# EAGLE board M168X (EAGLE 6.6.0)
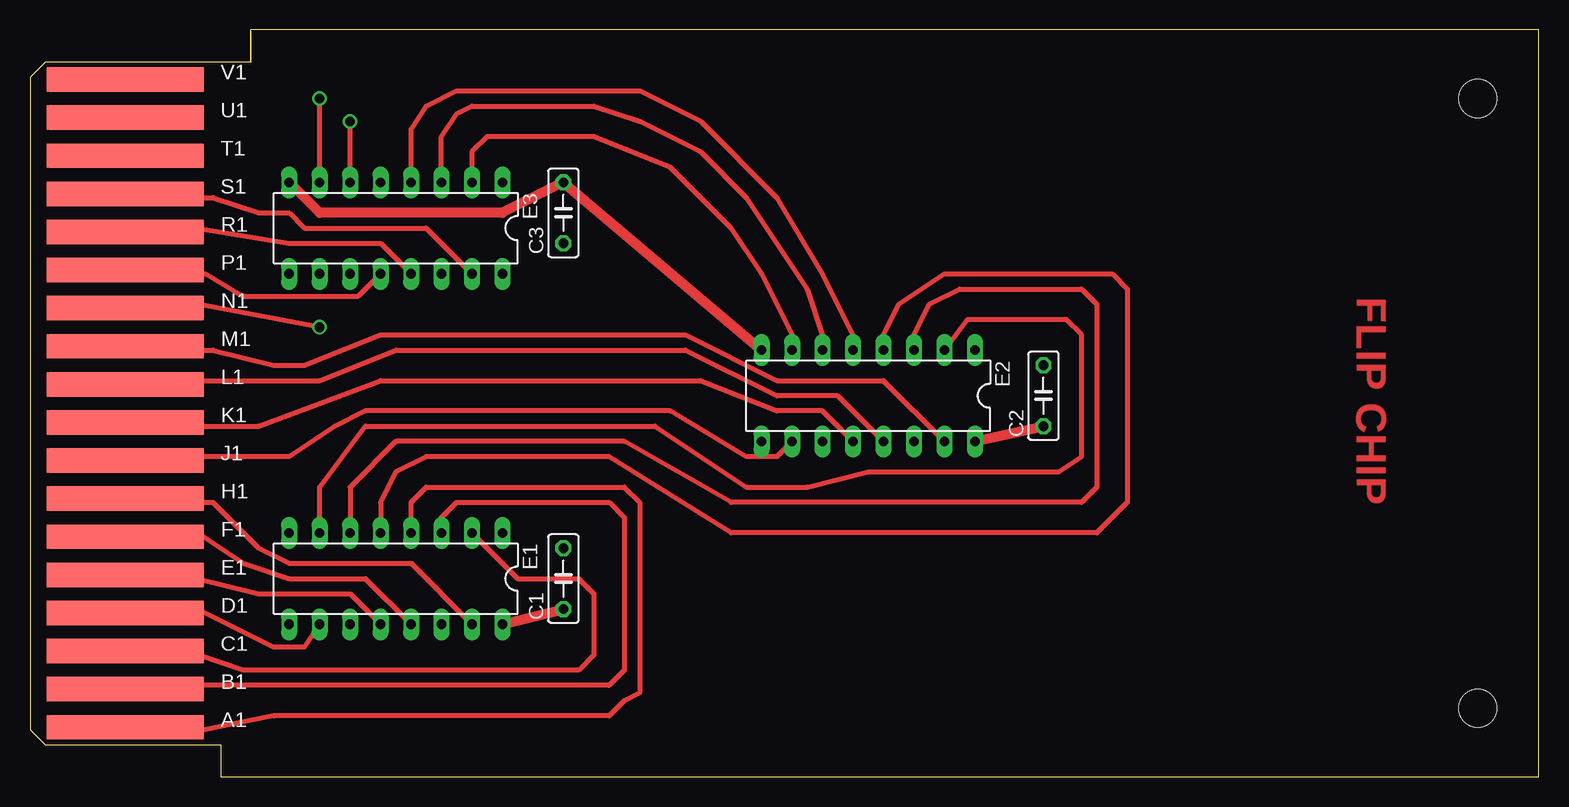
[diagram p0: board, top side]
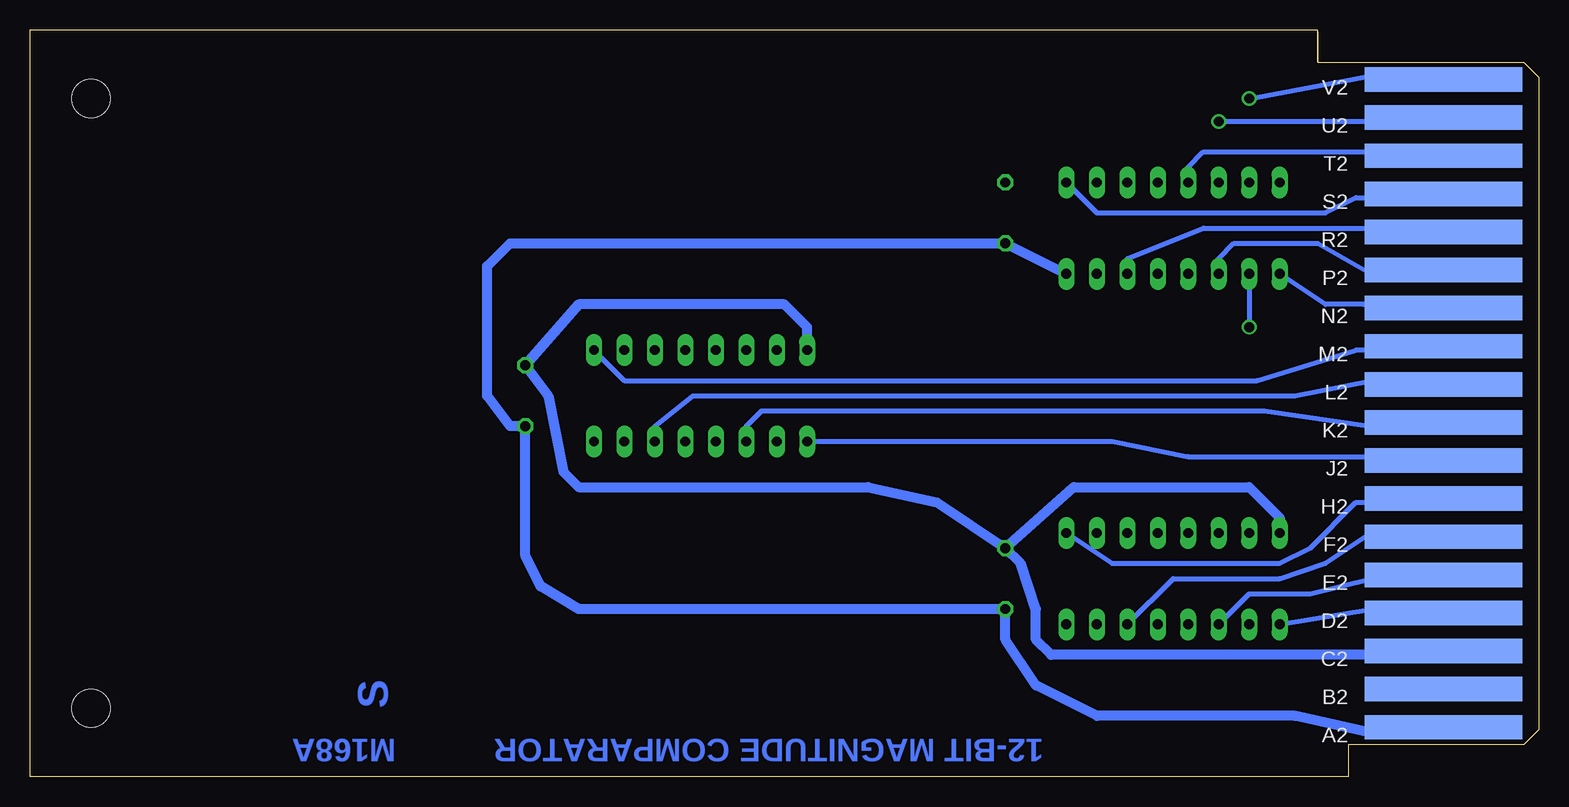
[diagram p1: board, bottom side, seen from below]

Size 125.73 x 62.23 mm. Coordinates in mm from the lower left corner, seen from the top.
Copper layers (1+16): Top 0.035mm / dielectric 1.5mm / Bottom 0.035mm
Design rules "16mils": minimum track width 16mil, minimum drill 32mil, track to track 15mil, track to pad 10mil, pad to pad 10mil, via to via 10mil, smd to smd 10mil, copper to edge 13mil, drill to drill 10mil, minimum pad ring 10mil, minimum via ring 8mil, stop-mask expansion 0mil, vias tented up to drill 0mil, thermal gap 10mil
Net classes: 1 supply: width 0.813 mm

## Footprints (pad centres in the part's own frame; a part is rotated, then mirrored left to right if it is on the bottom)
C050-025X075 = drill 0.813 octagon: 1 -2.54,0; 2 2.54,0
DIL16 = drill 0.813 long: 1 -8.89,-3.81; 2 -6.35,-3.81; 3 -3.81,-3.81; 4 -1.27,-3.81; 5 1.27,-3.81; 6 3.81,-3.81; 7 6.35,-3.81; 8 8.89,-3.81; 9 8.89,3.81; 10 6.35,3.81; 11 3.81,3.81; 12 1.27,3.81; 13 -1.27,3.81; 14 -3.81,3.81; 15 -6.35,3.81; 16 -8.89,3.81
EDGE-CON2 = smd 13.106 x 2.032: A1 7.938,4.128; B1 7.938,7.303; C1 7.938,10.477; D1 7.938,13.652; E1 7.938,16.828; F1 7.938,20.003; H1 7.938,23.177; J1 7.938,26.352; K1 7.938,29.527; L1 7.938,32.703; M1 7.938,35.877; N1 7.938,39.053; P1 7.938,42.227; R1 7.938,45.403; S1 7.938,48.578; T1 7.938,51.752; U1 7.938,54.928; V1 7.938,58.102 | smd 13.106 x 2.032 bottom: A2 7.938,4.128; B2 7.938,7.303; C2 7.938,10.477; D2 7.938,13.652; E2 7.938,16.828; F2 7.938,20.003; H2 7.938,23.177; J2 7.938,26.352; K2 7.938,29.527; L2 7.938,32.703; M2 7.938,35.877; N2 7.938,39.053; P2 7.938,42.227; R2 7.938,45.403; S2 7.938,48.578; T2 7.938,51.752; U2 7.938,54.928; V2 7.938,58.102
SINGLE = hole 3.175: 120.65,56.515; 120.65,5.715

## Placement (x,y rotation side)
C1  .01uF  [C050-025X075]  44.45,16.51 90 top
C2  .01uF  [C050-025X075]  84.46,31.75 90 top
C3  .01uF  [C050-025X075]  44.45,46.99 90 top
E1  7485N  [DIL16]  30.48,16.51 180 top
E2  7485N  [DIL16]  69.85,31.75 180 top
E3  7485N  [DIL16]  30.48,45.72 180 top
U$1  [EDGE-CON2]  0,0 0 top
U$2  OUTLINE-SINGLE  [SINGLE]  0,0 0 top

## Library data of the parts
C1-C3 = rcl
E1-E3 = 74xx-us
U$1 U$2 = dec-con

## Nets
A1: E1.4 U$1.A1
B1: E1.3 U$1.B1
C1: E1.2 U$1.C1
D1: E1.10 U$1.D1
D2: E1.9 U$1.D2
E1: E1.12 U$1.E1
E2: E1.11 U$1.E2
F1: E1.13 U$1.F1
F2: E1.14 U$1.F2
GND [supply]: C1.2 C2.2 C3.2 E1.8 E2.8 E3.8 U$1.C2
H1: E1.15 U$1.H1
H2: E1.1 U$1.H2
J1: E2.10 U$1.J1
J2: E2.9 U$1.J2
K1: E2.12 U$1.K1
K2: E2.11 U$1.K2
L1: E2.13 U$1.L1
L2: E2.14 U$1.L2
M1: E2.15 U$1.M1
M2: E2.1 U$1.M2
N1: E3.10 U$1.N1
N2: E3.9 U$1.N2
N$32: E1.6 E2.3
N$33: E1.7 E2.2
N$34: E1.5 E2.4
N$46: E2.6 E3.3
N$47: E2.7 E3.2
N$48: E2.5 E3.4
P1: E3.12 U$1.P1
P2: E3.11 U$1.P2
R1: E3.13 U$1.R1
R2: E3.14 U$1.R2
S1: E3.15 U$1.S1
S2: E3.1 U$1.S2
T2: E3.5 U$1.T2
U2: E3.6 U$1.U2
V2: E3.7 U$1.V2
VCC [supply]: C1.1 C2.1 C3.1 E1.16 E2.16 E3.16 U$1.A2

## Tracks (layer width: path | path; a pad name or v marks a point on that pad's centre or on a via)
A1
  Top 0.406: E1.4 31.75,22.86 33.02,24.13 49.53,24.13 50.8,22.86 50.8,6.99 49.53,6.35 48.26,5.08 20.32,5.08 13.97,3.81 8.89,3.81 U$1.A1
B1
  Top 0.406: E1.3 34.29,21.59 35.56,22.86 48.26,22.86 49.53,21.59 49.53,8.89 48.26,7.62 8.89,7.62 U$1.B1
C1
  Top 0.406: E1.2 40.64,16.51 45.72,16.51 46.99,15.24 46.99,10.16 45.72,8.89 17.78,8.89 13.97,10.16 8.89,10.16 U$1.C1
D1
  Top 0.406: E1.10 22.86,10.79 20.32,10.79 13.97,13.97 8.89,13.97 U$1.D1
D2
  Bottom 0.406: E1.9 13.97,13.97 8.26,13.97 U$1.D2
E1
  Top 0.406: U$1.E1 8.89,16.51 13.97,16.51 19.05,15.24 26.67,15.24 E1.12
E2
  Bottom 0.406: E1.11 24.13,15.24 19.05,15.24 13.97,16.51 12.7,16.51 8.89,16.51 U$1.E2
F1
  Top 0.406: U$1.F1 8.89,20.32 13.97,20.32 17.78,17.78 21.59,16.51 27.94,16.51 E1.13
F2
  Bottom 0.406: E1.14 30.48,16.51 21.59,16.51 17.78,17.78 13.97,20.32 8.26,20.32 U$1.F2
GND
  Top 0.813: E2.8 C3.2 39.37,46.99 24.13,46.99 E3.8
  Bottom 0.813: E2.8 60.96,37.47 62.87,39.37 80.01,39.37 C2.2 82.55,31.75 81.28,25.4 80.01,24.13 55.88,24.13 50.17,22.86 C1.2 | C1.2 38.74,24.13 24.13,24.13 21.59,21.59 E1.8 | U$1.C2 10.16,10.16 40.64,10.16 41.91,11.43 41.91,13.97 43.18,17.78 C1.2
H1
  Top 0.406: U$1.H1 8.89,22.86 15.24,22.86 19.05,19.05 21.59,17.78 31.75,17.78 E1.15
H2
  Bottom 0.406: E1.1 35.56,17.78 21.59,17.78 19.05,19.05 15.24,22.86 13.34,22.86 12.7,22.86 9.53,22.86 U$1.H2
J1
  Top 0.406: E2.10 62.23,26.67 59.69,26.67 53.34,30.48 27.94,30.48 25.4,29.21 21.59,26.67 8.89,26.67 U$1.J1
J2
  Bottom 0.406: E2.9 35.56,27.94 29.21,26.67 8.89,26.67 U$1.J2
K1
  Top 0.406: U$1.K1 8.89,29.21 19.05,29.21 29.21,33.02 55.88,33.02 62.23,30.48 66.04,30.48 E2.12
K2
  Bottom 0.406: E2.11 66.04,29.21 64.77,30.48 22.86,30.48 13.97,29.21 8.89,29.21 U$1.K2
L1
  Top 0.406: U$1.L1 8.89,33.02 24.13,33.02 30.48,35.56 54.61,35.56 62.23,31.75 67.31,31.75 E2.13
L2
  Bottom 0.406: E2.14 73.66,29.21 70.49,31.75 20.32,31.75 13.97,33.02 8.89,33.02 U$1.L2
M1
  Top 0.406: U$1.M1 8.89,35.56 15.24,35.56 20.32,34.29 22.86,34.29 29.21,36.83 54.61,36.83 62.23,33.02 71.12,33.02 E2.15
M2
  Bottom 0.406: E2.1 76.2,33.02 23.5,33.02 15.24,35.56 8.89,35.56 U$1.M2
N1  (via drill 0.81)
  Top 0.406: v24.13,37.47 13.97,39.37 8.89,39.37 U$1.N1
  Bottom 0.406: E3.10 v24.13,37.47
N2
  Bottom 0.406: E3.9 17.78,39.37 14.61,39.37 13.97,39.37 8.89,39.37 U$1.N2
N$32
  Top 0.406: E2.3 73.66,36.83 74.93,39.37 77.47,40.64 87.63,40.64 88.9,39.37 88.9,24.13 87.63,22.86 58.42,22.86 49.53,27.94 30.48,27.94 26.67,24.13 E1.6
N$33
  Top 0.406: E1.7 24.13,24.13 27.94,29.21 52.07,29.21 59.69,24.13 64.77,24.13 69.85,25.4 85.73,25.4 87.63,26.67 87.63,36.83 86.36,38.1 78.11,38.1 E2.2
N$34
  Top 0.406: E2.4 71.12,36.83 72.39,39.37 76.2,41.91 90.17,41.91 91.44,40.64 91.44,22.86 88.9,20.32 58.42,20.32 48.26,26.67 33.02,26.67 30.48,25.4 29.21,22.86 E1.5
N$46
  Top 0.406: E3.3 34.29,53.34 35.56,55.24 36.83,55.88 46.99,55.88 50.8,54.61 55.88,52.07 59.69,48.26 64.77,40.64 66.04,36.83 E2.6
N$47
  Top 0.406: E2.7 63.5,36.83 60.96,41.91 58.42,45.72 53.34,50.8 46.99,53.34 38.1,53.34 36.83,52.07 E3.2
N$48
  Top 0.406: E3.4 31.75,53.98 33.02,55.88 35.56,57.15 50.8,57.15 55.88,54.61 62.23,48.26 66.04,41.91 68.58,36.83 E2.5
P1
  Top 0.406: E3.12 27.31,40.01 17.78,40.01 14.61,41.91 8.89,41.91 U$1.P1
P2
  Bottom 0.406: E3.11 26.67,43.18 25.4,44.45 18.42,44.45 13.97,41.91 9.53,41.91 U$1.P2
R1
  Top 0.406: U$1.R1 8.89,45.72 13.97,45.72 21.59,44.45 29.21,44.45 E3.13
R2
  Bottom 0.406: E3.14 34.29,43.18 27.94,45.72 8.89,45.72 U$1.R2
S1
  Top 0.406: U$1.S1 8.89,48.26 15.24,48.26 19.05,46.99 21.59,46.99 22.86,45.72 33.02,45.72 E3.15
S2
  Bottom 0.406: E3.1 36.83,46.99 17.78,46.99 15.24,48.26 13.97,48.26 13.34,48.26 8.89,48.26 U$1.S2
T2
  Bottom 0.406: E3.5 29.21,50.8 27.94,52.07 8.89,52.07 U$1.T2
U2  (via drill 0.81)
  Top 0.406: E3.6 v26.67,54.61
  Bottom 0.406: v26.67,54.61 8.89,54.61 U$1.U2
V2  (via drill 0.81)
  Top 0.406: E3.7 v24.13,56.52
  Bottom 0.406: v24.13,56.52 13.97,58.42 8.89,58.42 U$1.V2
VCC
  Top 0.813: E2.16 C2.1 | E1.16 C1.1
  Bottom 0.813: U$1.A2 8.89,4.13 8.89,3.81 14.61,3.81 20.32,5.08 36.83,5.08 41.91,7.62 44.45,11.43 C1.1 80.01,13.97 83.19,15.88 84.46,18.41 C2.1 85.73,29.21 87.63,31.75 87.63,42.55 85.73,44.45 C3.1 E3.16

## Text on the board
Top: FLIP CHIP
Bottom: S | 12-BIT MAGNITUDE COMPARATOR | M168A